# Altium PCB zynqEXP.PcbDoc (part 2 of 2)
Units mil, origin at the board's own origin, x right, y up, seen from the top; angles counter-clockwise.
Board outline 7005 x 5105 mil, 2 copper layers (Top Layer, Bottom Layer); 92 components, 234 nets, 748 pads, 222 vias.
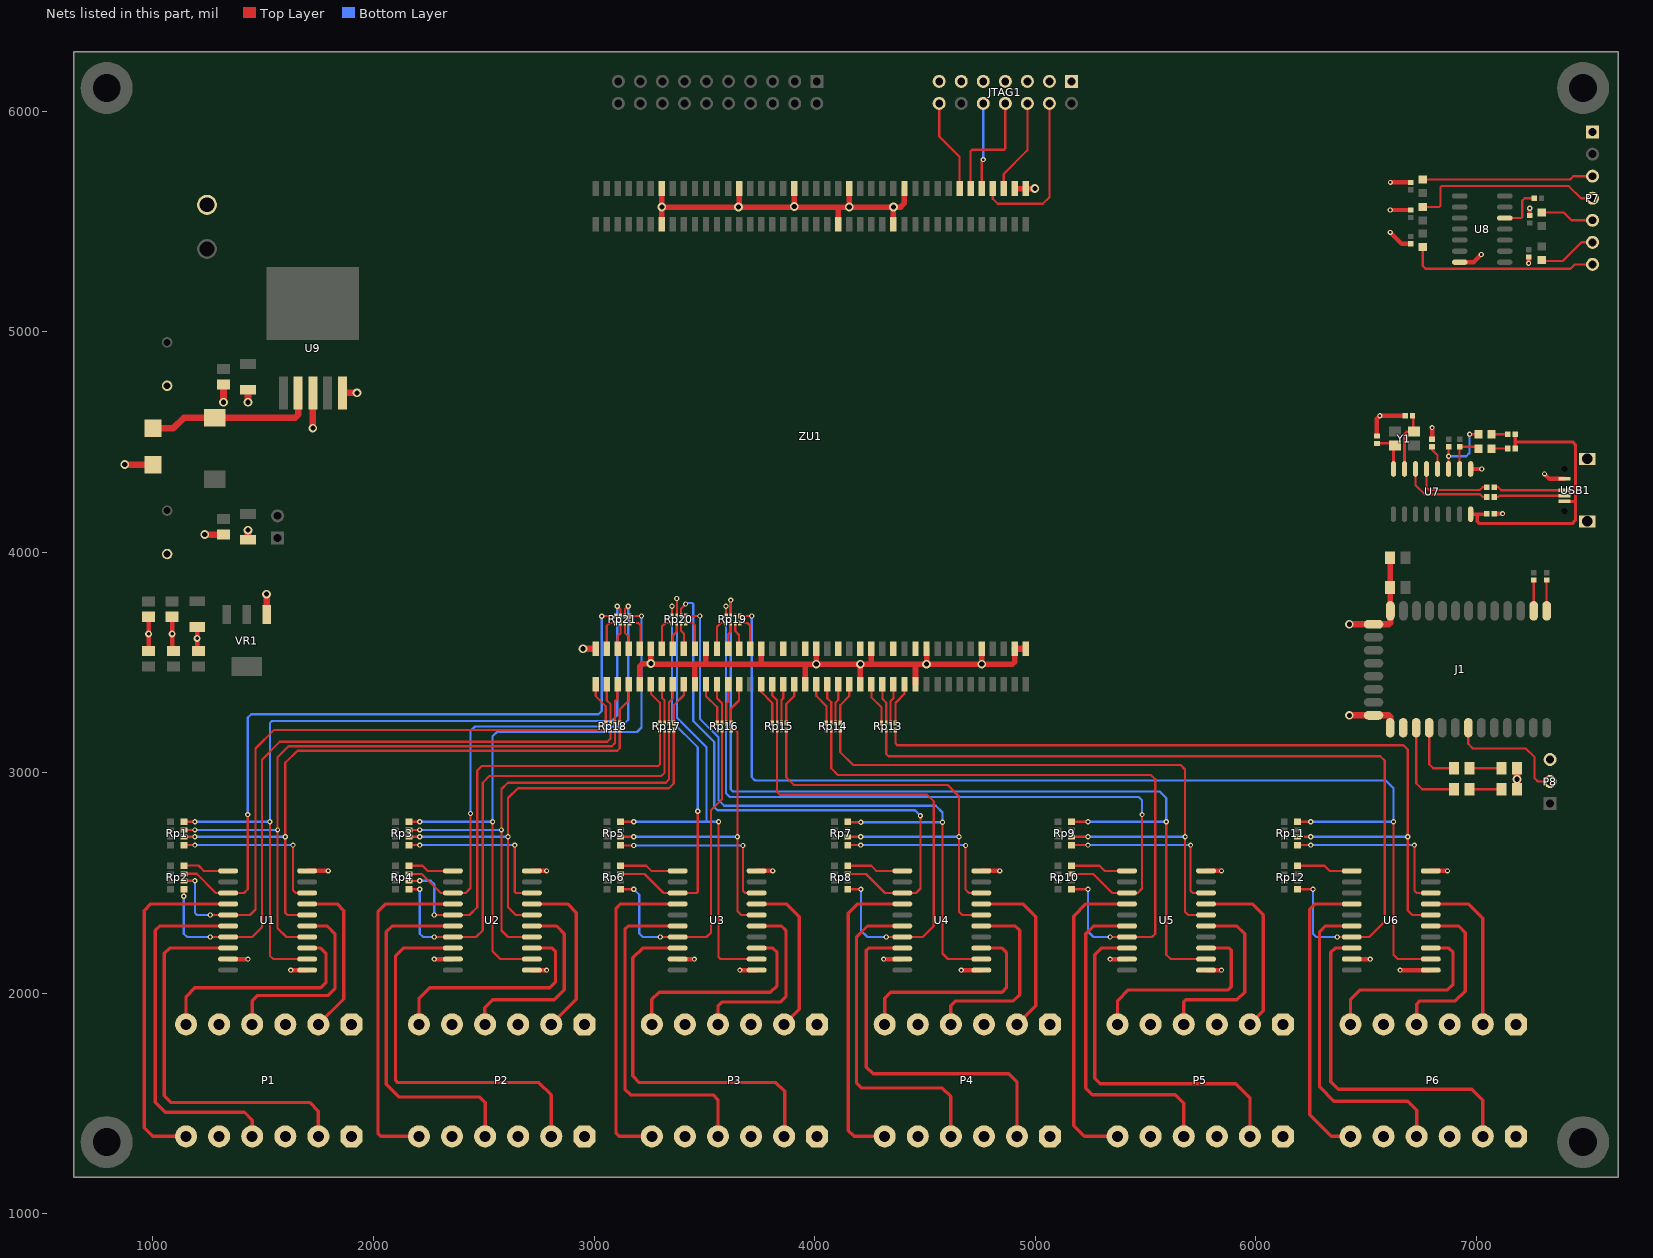
[diagram p2: the nets of this part, all layers, seen from the top]

## Via types
v1: diameter 23.62, hole 11.81, Top Layer to Bottom Layer, tented both sides, 191 vias
v2: diameter 39.37, hole 23.62, Top Layer to Bottom Layer, tented both sides, 24 vias
v3: diameter 31.5, hole 15.75, Top Layer to Bottom Layer, tented both sides, 7 vias

## Nets (pads, with @x,y where several pads share a name; then routed paths per layer and width w, separated by ;. In a path a pad name is that pad's centre, name@x,y a point inside that pad or via, vN(x,y) a via of type N, cw(c..) or ccw(c..) an arc to the next point about the centre after c; other vN are vias at no path point) (continued)
B35_LN16: Rp10.7 Rp19.4 U5.13 | length 3555.8
  Top Layer w10: Rp19.4@3598.5,3710.75 v1(3598.5,3755) ; Rp10.7@5165.32,2540.75 5264.25,2540.75 5350,2455 U5.13@5416.87,2455 5465,2455 5485,2475 v1(5485,2810)
  Bottom Layer w10: v1(3598.5,3755) 3598.5,2906.5 3615,2890 5470,2890 5485,2875 v1(5485,2810)
B35_LN17: Rp3.7 Rp17.7 U2.4 | length 2213.5
  Top Layer w10: Rp3.7@2160.32,2740.75 v1(2210,2740.75) ; U2.4@2718.13,2255 2610,2255 2580,2285 v1(2580,2740.75) 2580,2925.75 2609.25,2955 3325,2955 3339.84,2969.84 Rp17.7@3339.84,3194.25
  Bottom Layer w10: v1(2210,2740.75) v1(2580,2740.75)
B35_LN18: Rp8.7 Rp20.2 U4.13 | length 2716.1
  Top Layer w10: Rp20.2@3394.84,3710.75 3394.84,3744.84 v1(3415,3765) ; Rp8.7@4150.32,2540.75 4233.5,2540.75 4319.25,2455 U4.13@4397.87,2455 4460,2455 4480,2475 v1(4480,2805)
  Bottom Layer w10: v1(3415,3765) 3420,3770 3445,3770 3450,3765 3450,3234.12 3545,3139.12 3545,2845 3560,2830 4455,2830 v1(4480,2805)
B35_LN19: Rp4.6 Rp17.5 U2.15 | length 2086.8
  Top Layer w10: Rp4.6@2160.32,2509.25 2209.25,2509.25 v1(2210,2510) ; v1(2275,2355) U2.15@2359.87,2355 2435,2355 2470,2390 2470,3010 2490,3030 3290,3030 3298.5,3038.5 Rp17.5@3298.5,3194.25
  Bottom Layer w10: v1(2210,2510) 2260,2510 2275,2495 v1(2275,2355)
B35_LN20: Rp6.7 Rp20.4 U3.13 | length 1774.8
  Top Layer w10: Rp6.7@3120.32,2540.75 3229.25,2540.75 3315,2455 U3.13@3378.87,2455 3465,2455 3470,2460 v1(3470,2825) ; Rp20.4@3353.5,3710.75 v1(3353.5,3755)
  Bottom Layer w10: v1(3353.5,3755) 3353.5,3231.5 3470,3115 v1(3470,2825)
B35_LN21: Rp1.7 Rp18.7 U1.4 | length 2966.5
  Top Layer w10: Rp1.7@1140.32,2740.75 v1(1190,2740.75) ; U1.4@1699.13,2255 1605,2255 1565,2295 v1(1565,2740.75) 1565,3070 1615,3120 3080,3120 3094.84,3134.84 Rp18.7@3094.84,3194.25
  Bottom Layer w10: v1(1190,2740.75) v1(1565,2740.75)
B35_LN22: Rp4.7 Rp21.2 U2.13 | length 2338.6
  Top Layer w10: Rp4.7@2160.32,2540.75 2219.25,2540.75 2305,2455 U2.13@2359.87,2455 2418.15,2455 2440,2476.85 v1(2440,2815) ; Rp21.2@3139.84,3710.75 3139.84,3739.84 v1(3155,3755)
  Bottom Layer w10: v1(2440,2815) 2440,3190 2460,3210 3125,3210 3155,3240 v1(3155,3755)
B35_LN23: Rp2.6 Rp18.5 U1.15 | length 2837.6
  Top Layer w10: Rp2.6@1140.32,2510 v1(1190,2510) ; v1(1260,2355) U1.15@1340.87,2355 1440,2355 1465,2380 1465,3110 1549.25,3194.25 Rp18.5@3053.5,3194.25
  Bottom Layer w10: v1(1190,2510) 1190,2365 1200,2355 v1(1260,2355)
B35_LN24: Rp2.7 Rp21.4 U1.13 | length 3221.9
  Top Layer w10: Rp2.7@1140.32,2541.5 1198.5,2541.5 1285,2455 U1.13@1340.87,2455 1413.15,2455 1430,2471.85 v1(1430,2810) ; v1(3035,3710) 3035.75,3710.75 Rp21.4@3098.5,3710.75
  Bottom Layer w10: v1(1430,2810) 1430,3250 1445,3265 3020,3265 3035,3280 v1(3035,3710)
B35_LP1: Rp11.6 Rp13.8 U6.6 | length 3738.5
  Top Layer w10: Rp13.8@4366.5,3194.25 4366.5,3133.5 4375,3125 6670,3125 6690,3105 v1(6690,2710) 6690,2375 6710,2355 U6.6@6794.13,2355 ; Rp11.6@6190.32,2709.25 v1(6250,2709.25)
  Bottom Layer w10: v1(6250,2709.25) 6689.25,2709.25 v1(6690,2710)
B35_LP2: ZU1.102
B35_LP3: Rp12.5 Rp13.6 U6.17 | length 3743.4
  Top Layer w10: Rp13.6@4325.16,3194.25 4325.16,3084.84 4335,3075 6565,3075 6585,3055 6585,2325 6515,2255 U6.17@6435.87,2255 v1(6370,2255) ; Rp12.5@6190.32,2471.85 v1(6260,2471.85)
  Bottom Layer w10: v1(6260,2471.85) 6260,2270 6275,2255 v1(6370,2255)
B35_LP4: ZU1.106
B35_LP5: Rp9.6 Rp14.8 U5.6 | length 2957.1
  Top Layer w10: Rp14.8@4116.5,3194.25 4116.5,3093.5 4175,3035 5660,3035 5680,3015 v1(5680,2709.25) 5680,2370 5695,2355 U5.6@5775.13,2355 ; Rp9.6@5165.32,2709.25 v1@5239.25,2709.25
  Bottom Layer w10: v1(5240,2709.25) v1(5680,2709.25)
B35_LP6: ZU1.112
B35_LP7: Rp10.5 Rp14.6 U5.17 | length 2953
  Top Layer w10: Rp14.6@4075.16,3194.25 4075.16,3019.84 4105,2990 5525,2990 5545,2970 5545,2270 5530,2255 U5.17@5416.87,2255 v1(5340,2255) ; Rp10.5@5165.32,2471.85 v1(5240,2471.85)
  Bottom Layer w10: v1(5240,2471.85) 5240,2280 5265,2255 v1(5340,2255)
B35_LP8: ZU1.116
B35_LP9: Rp7.6 Rp15.8 U4.6 | length 2169.1
  Top Layer w10: Rp15.8@3871.5,3194.25 3871.5,2979.25 3905.75,2945 4602.64,2945 4655,2892.64 v1(4655,2709.25) 4655,2370 4670,2355 U4.6@4756.13,2355 ; Rp7.6@4150.32,2709.25 v1(4209.25,2709.25)
  Bottom Layer w10: v1(4209.25,2709.25) v1(4655,2709.25)
B35_LP10: ZU1.122
B35_LP11: Rp8.5 Rp15.6 U4.17 | length 2183.9
  Top Layer w10: Rp15.6@3830.16,3194.25 3830.16,2912.48 3842.64,2900 4510,2900 4540,2870 4540,2305 4490,2255 U4.17@4397.87,2255 v1(4325,2255) ; Rp8.5@4150.32,2471.85 v1(4210,2471.85)
  Bottom Layer w10: v1(4210,2471.85) 4210,2285 4240,2255 v1(4325,2255)
B35_LP12: ZU1.126
B35_LP13: Rp5.6 Rp16.8 U3.6 | length 1468.8
  Top Layer w10: Rp5.6@3120.32,2709.25 v1(3180,2709.25) ; Rp16.8@3621.5,3194.25 3640.75,3194.25 3650,3185 v1(3650,2709.25) 3650,2372.64 3667.64,2355 U3.6@3737.13,2355
  Bottom Layer w10: v1(3180,2709.25) v1(3650,2709.25)
B35_LP14: Rp11.8 Rp19.1 U6.2 | length 5082.1
  Top Layer w10: Rp19.1@3661.5,3710.75 v1(3715,3710.75) ; Rp11.8@6190.32,2778.15 v1(6250,2778.15) ; v1(6625,2778.15) 6625,2175 6645,2155 U6.2@6794.13,2155
  Bottom Layer w10: v1(3715,3710.75) 3715,2980 3730,2965 6590,2965 6625,2930 v1(6625,2778.15) v1(6250,2778.15)
B35_LP15: Rp6.5 Rp16.6 U3.17 | length 1551
  Top Layer w10: Rp6.5@3120.32,2471.85 v1(3180,2471.85) ; v1(3300,2255) U3.17@3378.87,2255 3510,2255 3530,2275 3530,2830 3580.16,2880.16 Rp16.6@3580.16,3194.25
  Bottom Layer w10: v1(3180,2471.85) 3205,2446.85 3205,2270.75 3220.75,2255 v1(3300,2255)
B35_LP16: Rp9.8 Rp19.3 U5.2 | length 4249.2
  Top Layer w10: Rp19.3@3620.16,3710.75 3620.31,3710.91 v1(3620.31,3782.69) ; Rp9.8@5165.32,2778.15 v1(5240,2778.15) ; v1(5595,2778.15) 5595,2175 5615,2155 U5.2@5775.13,2155
  Bottom Layer w10: v1(3620.31,3782.69) 3620.31,2924.69 3630,2915 5565,2915 5595,2885 v1(5595,2778.15) v1(5240,2778.15)
B35_LP17: Rp3.6 Rp17.8 U2.6 | length 2089.7
  Top Layer w10: Rp3.6@2160.32,2709.25 2209.25,2709.25 v1(2210,2710) ; U2.6@2718.13,2355 2645,2355 2610,2390 2610,2885 2655,2930 3340,2930 3361.5,2951.5 Rp17.8@3361.5,3194.25
  Bottom Layer w10: v1(2210,2710) 2609.25,2710 v1(2610,2709.25)
B35_LP18: Rp7.8 Rp20.1 U4.2 | length 3229.7
  Top Layer w10: Rp20.1@3416.5,3710.75 v1(3480,3710.75) ; Rp7.8@4150.32,2778.15 4153.46,2775 v1(4210,2775) ; v1(4580,2775) 4580,2180 4605,2155 U4.2@4756.13,2155
  Bottom Layer w10: v1(3480,3710.75) 3480,3245 3565,3160 3565,2875 3590,2850 4550,2850 4580,2820 v1(4580,2775) v1(4210,2775)
B35_LP19: Rp4.5 Rp17.6 U2.17 | length 2263.1
  Top Layer w10: Rp4.5@2160.32,2471.85 v1(2210,2471.85) ; v1(2275,2255) U2.17@2359.87,2255 2465,2255 2495,2285 2495,2955 2525,2985 3305,2985 3320.16,3000.16 Rp17.6@3320.16,3194.25
  Bottom Layer w10: v1(2210,2471.85) 2210,2270 2225,2255 v1(2275,2255)
B35_LP20: Rp5.8 Rp20.3 U3.2 | length 2383
  Top Layer w10: Rp5.8@3120.32,2778.15 v1(3180,2778.15) ; v1(3375,3790) 3376.31,3788.69 3376.31,3711.91 Rp20.3@3375.16,3710.75 ; v1(3565,2778.15) 3565,2163.5 3573.5,2155 U3.2@3737.13,2155
  Bottom Layer w10: v1(3180,2778.15) v1(3565,2778.15) ; v1(3375,3790) 3376.31,3788.69 3376.31,3248.69 3510,3115 3510,2778.15
B35_LP21: Rp1.6 Rp18.8 U1.6 | length 2870.8
  Top Layer w10: Rp1.6@1140.32,2709.25 v1(1190,2709.25) ; U1.6@1699.13,2355 1610,2355 1600,2365 v1(1600,2710) 1600,3045 1655,3100 3105,3100 3116.5,3111.5 Rp18.8@3116.5,3194.25
  Bottom Layer w10: v1@1189.25,2709.25 1599.25,2709.25 v1(1600,2710)
B35_LP22: Rp3.8 Rp21.1 U2.2 | length 2798.1
  Top Layer w10: Rp3.8@2160.32,2778.15 v1(2210,2778.15) ; v1(2540,2778.15) 2540,2190 2575,2155 U2.2@2718.13,2155 ; Rp21.1@3161.5,3710.75 v1(3215,3710.75)
  Bottom Layer w10: v1(2210,2778.15) v1(2540,2778.15) 2540,3165 2560,3185 3195,3185 3215,3205 v1(3215,3710.75)
B35_LP23: Rp2.5 Rp18.6 U1.17 | length 3001.2
  Top Layer w10: v1(1140,2440) 1140.32,2440.32 Rp2.5@1140.32,2472.6 ; v1(1260,2255) U1.17@1340.87,2255 1450,2255 1495,2300 1495,3060 1575,3140 3060,3140 3075.16,3155.16 Rp18.6@3075.16,3194.25
  Bottom Layer w10: v1(1140,2440) 1140,2270 1155,2255 v1(1260,2255)
B35_LP24: Rp1.8 Rp21.3 U1.2 | length 3756.9
  Top Layer w10: Rp1.8@1140.32,2778.15 v1(1190,2778.15) ; v1@1530,2780 v1(1530,2778.15) 1530,2170 1545,2155 U1.2@1699.13,2155 ; v1(3105,3755) 3120.16,3739.84 Rp21.3@3120.16,3710.75
  Bottom Layer w10: v1(1190,2778.15) v1(1530,2778.15) 1530,3225 1540,3235 3080,3235 3105,3260 v1(3105,3755)
BLE_SLEEP: J1.23
CH340_RXD: D3.K R12.2 U7.3 | length 326.8
  Top Layer w10: U7.3@6875,4377.36 R12.2@6875,4478.27 ; v1(6970,4535) D3.K@7009.69,4535
  Bottom Layer w10: v1(6875,4435) 6955,4435 6970,4450 v1(6970,4535)
CH340_TXD: D4.K R11.2 U7.2 | length 189
  Top Layer w10: U7.2@6925,4377.36 R11.2@6925,4478.27 7001.42,4478.27 D4.K@7009.69,4470
D0: P7.3 R1.2 | length 776.1
  Top Layer w10: R1.2@6757.64,5690.32 7425.32,5690.32 7440,5705 P7.3@7527.64,5705
D1: P7.4 R3.2 | length 881.8
  Top Layer w10: R3.2@6757.64,5565.32 6832.95,5565.32 6837.64,5570 6837.64,5655 6842.64,5660 7420,5660 7475,5605 P7.4@7527.64,5605
D2: P7.5 R9.2 | length 244.6
  Top Layer w10: R9.2@7297.64,5540.32 7397.32,5540.32 7432.64,5505 P7.5@7527.64,5505
D3: P7.6 R7.2 | length 267.1
  Top Layer w10: R7.2@7297.64,5324.69 7302.32,5320 7392.64,5320 7477.64,5405 P7.6@7527.64,5405
DIR0: P1.4 U1.16 | length 1666.2
  Top Layer w15: U1.16@1340.87,2305 1030,2305 1010,2285 1010,1505 1055,1460 1415,1460 1450,1425 P1.4@1450,1351.06
DIR1: P2.4 U2.16 | length 1639.2
  Top Layer w15: U2.16@2359.87,2305 2085,2305 2058.15,2278.15 2058.15,1586.85 2115,1530 2480,1530 2506,1504 P2.4@2506,1351.06
DIR2: P3.4 U3.16 | length 1578.5
  Top Layer w15: U3.16@3378.87,2305 3155,2305 3140,2290 3140,1565 3166,1539 3541,1539 3562,1518 P3.4@3562,1351.06
DIR3: P4.4 U4.16 | length 1523.6
  Top Layer w15: U4.16@4397.87,2305 4240,2305 4190,2255 4190,1595 4215,1570 4580,1570 4618,1532 P4.4@4618,1351.06
DIR4: P5.4 U5.16 | length 1523.9
  Top Layer w15: U5.16@5416.87,2305 5265,2305 5230,2270 5230,1570 5260,1540 5635,1540 5674,1501 P5.4@5674,1351.06
DIR5: P6.4 U6.16 | length 1463.7
  Top Layer w15: U6.16@6435.87,2305 6315,2305 6290,2280 6290,1575 6355,1510 6690,1510 6730,1470 P6.4@6730,1351.06
DIR6: P1.10 U1.5 | length 894.2
  Top Layer w15: P1.10@1450,1858.94 1450,1965 1475,1990 1795,1990 1825,2020 1825,2270 1790,2305 U1.5@1699.13,2305
DIR7: P2.10 U2.5 | length 886
  Top Layer w15: P2.10@2506,1858.94 2505,1859.94 2505,1935 2540,1970 2820,1970 2865,2015 2865,2270 2830,2305 U2.5@2718.13,2305
DIR8: P3.10 U3.5 | length 850
  Top Layer w15: P3.10@3562,1858.94 3562,1942 3580,1960 3845,1960 3870,1985 3870,2285 3850,2305 U3.5@3737.13,2305
DIR9: P4.10 U4.5 | length 890.9
  Top Layer w15: P4.10@4618,1858.94 4618,1943 4640,1965 4902,1965 4930,1993 4930,2285 4910,2305 U4.5@4756.13,2305
DIR10: P5.10 U5.5 | length 850.7
  Top Layer w15: P5.10@5674,1858.94 5674,1961 5683,1970 5915,1970 5950,2005 5950,2270 5915,2305 U5.5@5775.13,2305
DIR11: P6.10 U6.5 | length 769.2
  Top Layer w15: P6.10@6730,1858.94 6730,1950 6745,1965 6905,1965 6950,2010 6950,2275 6920,2305 U6.5@6794.13,2305
ENA0: P1.2 U1.18 | length 1788.5
  Top Layer w15: U1.18@1340.87,2205 1075,2205 1050.75,2180.75 1050.75,1534.25 1080,1505 1710,1505 1750,1465 P1.2@1750,1351.06
ENA1: P2.2 U2.18 | length 1760.6
  Top Layer w15: U2.18@2359.87,2205 2135,2205 2100,2170 2100,1605 2110,1595 2750,1595 2806,1539 P2.2@2806,1351.06
ENA2: P3.2 U3.18 | length 1681.7
  Top Layer w15: U3.18@3378.87,2205 3220,2205 3175,2160 3175,1625 3205,1595 3825,1595 3865,1555 3865,1354.06 P3.2@3862,1351.06
ENA3: P4.2 U4.18 | length 1654.1
  Top Layer w15: U4.18@4397.87,2205 4245,2205 4235,2195 4235,1665 4265,1635 4880,1635 4918,1597 P4.2@4918,1351.06
ENA4: P5.2 U5.18 | length 1635.1
  Top Layer w15: U5.18@5416.87,2205 5300,2205 5270,2175 5270,1615 5295,1590 5910,1590 5974,1526 P5.2@5974,1351.06
ENA5: P6.2 U6.18 | length 1578.9
  Top Layer w15: U6.18@6435.87,2205 6360,2205 6340,2185 6340,1598.94 6373.94,1565 6980,1565 7030,1515 P6.2@7030,1351.06
ENA6: P1.8 U1.7 | length 742
  Top Layer w15: U1.7@1699.13,2405 1835,2405 1865,2375 1865,1973.94 P1.8@1750,1858.94
ENA7: P2.8 U2.7 | length 771.7
  Top Layer w15: U2.7@2718.13,2405 2880,2405 2920,2365 2920,1972.94 P2.8@2806,1858.94
ENA8: P3.8 U3.7 | length 733.5
  Top Layer w15: U3.7@3737.13,2405 3872.64,2405 3930,2347.64 3930,1926.94 P3.8@3862,1858.94
ENA9: P4.8 U4.7 | length 793.9
  Top Layer w15: U4.7@4756.13,2405 4945,2405 5002.64,2347.36 5002.64,1943.57 P4.8@4918,1858.94
ENA10: P5.8 U5.7 | length 801.9
  Top Layer w15: U5.7@5775.13,2405 5985,2405 6035,2355 6035,1919.94 P5.8@5974,1858.94
ENA11: P6.8 U6.7 | length 743.9
  Top Layer w15: U6.7@6794.13,2405 6965,2405 7030,2340 P6.8@7030,1858.94
GND: C1.1 C2.1 C3.1 C4.1 C5.1 C6.1 C7.1 C8.1 C9.1 C10.1 C11.1 C12.1 C13.2 C14.2 C15.1 C16.1 C17.1 C18.2 D1.K D2.K D5.1 J1.13 J1.14 J1.21 J1.22 JTAG1.1 JTAG1.2 JTAG1.3 JTAG1.4 JTAG1.5 JTAG1.6 JTAG1.7 P1.1 P1.3 P1.5 P1.7 P1.9 P1.11 P2.1 P2.3 P2.5 P2.7 P2.9 P2.11 P3.1 P3.3 P3.5 P3.7 P3.9 P3.11 P4.1 P4.3 P4.5 P4.7 P4.9 P4.11 P5.1 P5.3 P5.5 P5.7 P5.9 P5.11 P6.1 P6.3 P6.5 P6.7 P6.9 P6.11 P7.1 P8.3 P10.1 R2.1 R4.1 R6.1 R8.1 R10.1 U1.1 U1.10 U1.19 U2.1 U2.10 U2.19 U3.1 U3.10 U3.19 U4.1 U4.10 U4.19 U5.1 U5.10 U5.19 U6.1 U6.10 U6.19 U7.1 U8.7 U9.3 U9.5 USB1.5 USB1.6 USB1.7 VR1.1 ZU1.2 ZU1.4 ZU1.24 ZU1.25 ZU1.34 ZU1.35 ZU1.44 ZU1.54 ZU1.67 ZU1.68 ZU1.82 ZU1.84 ZU1.90 ZU1.100 ZU1.101 ZU1.110 ZU1.111 ZU1.120 ZU1.121 ZU1.130 ZU1.140 ZU1.141 ZU1.150 ZU1.151 ZU1.160 | length 9001.2
  Top Layer w20: C12.1@980,3551.2 C9.1@980,3707.19 ; C7.1@1086.75,3707.19 1086.75,3557.7 C11.1@1093.25,3551.2 ; C8.1@1200,3660.54 1200,3557.7 C10.1@1206.5,3551.2 ; U1.19@1340.87,2155 v1(1430.8,2155) ; v1(1625,2105) U1.1@1699.13,2105 ; U1.10@1699.13,2555 v1(1795,2555) ; v1(2275,2155) U2.19@2359.87,2155 ; U2.1@2718.13,2105 v1(2785,2105) ; U2.10@2718.13,2555 v1(2785,2555) ; U3.19@3378.87,2155 v1(3455,2155) ; v1(3661.5,2105) U3.1@3737.13,2105 ; U3.10@3737.13,2555 v1(3810,2555) ; v1(4312.88,2155) U4.19@4397.87,2155 ; v1(4665,2105) U4.1@4756.13,2105 ; U4.10@4756.13,2555 v1(4840,2555) ; v1(5340,2155) U5.19@5416.87,2155 ; U5.1@5775.13,2105 v1(5845,2105) ; U5.10@5775.13,2555 v1(5845,2555) ; U6.19@6435.87,2155 v1(6520,2155) ; C5.1@6550,4526.73 6550,4605 v1(6563.27,4618.27) C3.1@6678.27,4618.27 ; v1(6609.91,5450) 6661.65,5398.27 R6.1@6702.64,5398.27 ; v1(6609.91,5551.73) R4.1@6702.64,5551.73 ; C4.1@6609.96,3975 C4.1@6611.25,3973.71 ; v1(6611.25,5676.73) R2.1@6702.64,5676.73 ; v1(6655,2105) U6.1@6794.13,2105 ; U6.10@6794.13,2555 v1(6870,2555) ; C1.1@6800,4511.73 v1(6800,4565) ; U8.7@6925.28,5315 6988.3,5315 v1(7023.3,5350) ; U7.1@6975,4377.36 v1(7025,4377.36) ; C6.1@7081.73,4175 v1(7120,4175) ; v1(7237.64,5310) R8.1@7237.64,5338.27 ; R10.1@7242.64,5526.73 v1(7242.64,5560) ; v1(7310,4355) 7332.64,4332.36 USB1.5@7400,4332.36
  Top Layer w25: ZU1.151@3207.64,3400.83 3207.64,3482.64 3218.68,3493.68 v2@3258.96,3493.68 ; v2(3257.64,3495) ZU1.150@3257.64,3562.24 ; v2@3260.28,3492.36 3457.36,3492.36 ; ZU1.67@3307.64,5487.44 v2(3307.64,5565) ; ZU1.68@3307.64,5648.86 v2(3307.64,5565) ; ZU1.141@3457.64,3400.83 3457.64,3492.64 ; 3457.64,3492.36 3507.64,3492.36 ; ZU1.140@3507.64,3562.24 3507.64,3492.36 ; ZU1.54@3657.64,5648.86 3657.64,5567.64 v2(3655,5565) ; ZU1.130@3757.64,3562.24 3757.64,3495 3755,3492.36 ; v2(3907.64,5567.64) ZU1.44@3907.64,5648.86 ; ZU1.121@3957.64,3400.83 3957.64,3492.36 ; ZU1.120@4007.64,3562.24 v2(4007.64,3492.36) ; ZU1.35@4107.64,5487.44 4107.64,5565 ; v2(4157.64,5565) ZU1.34@4157.64,5648.86 ; ZU1.111@4207.64,3400.83 v2(4207.64,3492.36) ; ZU1.110@4257.64,3562.24 4257.64,3492.36 ; v2@4355,5565 v2(3655,5565) ; ZU1.25@4357.64,5487.44 v2(4357.64,5565) 4390,5565 4407.64,5582.64 ZU1.24@4407.64,5648.86 ; ZU1.101@4457.64,3400.83 4457.64,3492.36 ; v2(4507.64,3492.36) ZU1.100@4507.64,3562.24 ; ZU1.90@4757.64,3562.24 v2(4757.64,3492.36) ; ZU1.84@4907.64,3562.24 4907.64,3502.64 4897.36,3492.36 v2(4757.64,3492.36) ; ZU1.4@4907.64,5648.86 ZU1.2@4957.64,5648.86 v2(4998.86,5648.86) ; J1.13@6611.25,3734 6611.25,3973.71 C4.1@6611.25,3975 ; v2(3307.64,5565) v2(3655,5565) ; 3507.64,3492.36 3755,3492.36 ; 3755,3492.36 3957.64,3492.36 ; 3957.64,3492.36 v2(4007.64,3492.36) ; v2(4007.64,3492.36) v2(4207.64,3492.36) ; v2(4207.64,3492.36) 4257.64,3492.36 ; 4257.64,3492.36 v2(4757.64,3492.36)
  Top Layer w30: v2(872.32,4397.32) D5.1@1000,4397.32 ; v2(1235,4080) v2(1235,4080) C16.1@1320,4079.96 ; v2(1320,4680) C13.2@1320,4759.96 ; C17.1@1430.8,4056.34 v2(1430.8,4100) ; v2(1430.8,4680) C14.2@1430.8,4736.34 ; VR1.1@1515.55,3717.31 v2@1515.55,3809.45 ; v2(1725,4562.68) U9.3@1725,4722.44 ; U9.5@1858.86,4722.44 v2(1925,4722.44) ; v2(2950,3562.24) ZU1.160@3007.64,3562.24 ; v2(3257.64,3495) v2@3260.28,3492.36 ; ZU1.84@4907.64,3562.24 ZU1.82@4957.64,3562.24 ; v2(6425,3260) 6534.35,3260 J1.21@6534.48,3259.87 6603.17,3259.87 6609.91,3253.12 J1.22@6609.91,3204 ; v2(6425,3673.25) J1.14@6534.48,3673.25 6603.17,3673.25 6611.25,3681.34 J1.13@6611.25,3734 ; D2.K@7185.04,2925 D1.K@7185.04,3020
  other v2: 7185,2970 1515,3810
  other v3: 1200,3609.12 980,3629.2 1086.75,3630
NetC3_2: C3.2 U7.7 Y1.1 | length 278.8
  Top Layer w12: U7.7@6675,4377.36 6675,4535 6686.5,4546.5 Y1.1@6718.31,4546.5 6715,4549.8 C3.2@6715,4618.27
NetC5_2: C5.2 U7.8 Y1.3 | length 194.7
  Top Layer w12: C5.2@6550,4493.27 6621.93,4493.27 Y1.3@6631.69,4483.5 6625,4476.81 U7.8@6625,4377.36
NetD1_A: D1.A R15.2 | length 144.9
  Top Layer w10: R15.2@6970.04,3020 D1.A@7114.96,3020
NetD2_A: D2.A R16.2 | length 144.9
  Top Layer w10: R16.2@6970.04,2925 D2.A@7114.96,2925
NetD3_A: D3.A R17.1 | length 73
  Top Layer w10: D3.A@7070.32,4535 R17.1@7143.27,4535
NetD4_A: D4.A R18.2 | length 73
  Top Layer w10: D4.A@7070.32,4470 R18.2@7143.27,4470
NetD5_2: D5.2 L1.2 U9.2 | length 782.5
  Top Layer w30: D5.2@1000,4562.68 1092.68,4562.68 1140,4610 L1.2@1280,4610 1645,4610 1658.07,4623.07 U9.2@1658.07,4722.44
NetJ1_1: J1.1 R20.2 | length 139.4
  Top Layer w10: R20.2@7319.48,3873.27 7319.48,3734.43 J1.1@7319.91,3734
NetJ1_2: J1.2 R21.2 | length 139.3
  Top Layer w10: J1.2@7260.86,3734 R21.2@7260.86,3873.27
NetJ1_24: J1.24 R16.1 | length 435.1
  Top Layer w10: J1.24@6728.02,3204 6728.02,2951.98 6755,2925 R16.1@6899.96,2925
NetJ1_25: J1.25 R15.1 | length 286.4
  Top Layer w10: J1.25@6787.08,3204 6787.08,3037.92 6805,3020 R15.1@6899.96,3020
NetJ1_28: J1.28 P8.2 | length 565.4
  Top Layer w10: J1.28@6964.24,3204 6964.24,3130.76 6985,3110 7225,3110 7265,3070 7265,2975 7280,2960 P8.2@7330,2960
NetR19_1: R19.1 U8.12 | length 214.1
  Top Layer w10: U8.12@7130,5515 7204.37,5515 7209.37,5520 7209.37,5594.37 7220,5605 R19.1@7263.27,5605
NetRp1_5: Rp1.5 U1.8 | length 768.7
  Top Layer w10: Rp1.5@1140.32,2671.85 v1(1190,2671.85) ; v1(1635,2671.85) 1635,2466.85 1646.85,2455 U1.8@1699.13,2455
  Bottom Layer w10: v1(1190,2671.85) v1(1635,2671.85)
NetRp2_8: Rp2.8 U1.11 | length 210.4
  Top Layer w10: Rp2.8@1140.32,2578.9 1206.1,2578.9 1230,2555 U1.11@1340.87,2555
NetRp3_5: Rp3.5 U2.8 | length 771.7
  Top Layer w10: Rp3.5@2160.32,2671.85 v1(2210,2671.85) ; v1(2640,2671.85) 2640,2460 2645,2455 U2.8@2718.13,2455
  Bottom Layer w10: v1(2210,2671.85) v1(2640,2671.85)
NetRp4_8: Rp4.8 U2.11 | length 209.1
  Top Layer w10: Rp4.8@2160.32,2578.15 2221.85,2578.15 2245,2555 U2.11@2359.87,2555
NetRp5_5: Rp5.5 U3.8 | length 826.7
  Top Layer w10: Rp5.5@3120.32,2671.85 3122.17,2670 v1(3180,2670) ; v1(3675,2670) 3675,2465 3685,2455 U3.8@3737.13,2455
  Bottom Layer w10: v1(3180,2670) v1(3675,2670)
NetRp6_8: Rp6.8 U3.11 | length 268.1
  Top Layer w10: Rp6.8@3120.32,2578.15 3236.85,2578.15 3260,2555 U3.11@3378.87,2555
NetRp7_5: Rp7.5 U4.8 | length 812.8
  Top Layer w10: Rp7.5@4150.32,2671.85 v1(4209.25,2671.85) ; v1(4685,2670) 4685,2470 4700,2455 U4.8@4756.13,2455
  Bottom Layer w10: v1(4209.25,2671.85) 4683.15,2671.85 v1(4685,2670)
NetRp8_8: Rp8.8 U4.11 | length 257.1
  Top Layer w10: Rp8.8@4150.32,2578.15 4256.85,2578.15 4280,2555 U4.11@4397.87,2555
NetRp9_5: Rp9.5 U5.8 | length 820.8
  Top Layer w10: Rp9.5@5165.32,2671.85 v1(5240,2671.85) ; v1(5705,2671.85) 5705,2465 5715,2455 U5.8@5775.13,2455
  Bottom Layer w10: v1(5240,2671.85) v1(5705,2671.85)
NetRp10_8: Rp10.8 U5.11 | length 261.1
  Top Layer w10: Rp10.8@5165.32,2578.15 5291.85,2578.15 5315,2555 U5.11@5416.87,2555
NetRp11_5: Rp11.5 U6.8 | length 814.8
  Top Layer w10: Rp11.5@6190.32,2671.85 v1(6250,2671.85) ; v1(6720,2671.85) 6720,2465 6730,2455 U6.8@6794.13,2455
  Bottom Layer w10: v1(6250,2671.85) v1(6720,2671.85)
NetRp12_8: Rp12.8 U6.11 | length 255.1
  Top Layer w10: Rp12.8@6190.32,2578.15 6311.85,2578.15 6335,2555 U6.11@6435.87,2555
NetRp13_1: Rp13.1 ZU1.103 | length 192.1
  Top Layer w10: Rp13.1@4366.5,3225.75 4366.5,3316.34 4407.64,3357.48 ZU1.103@4407.64,3400.83
NetRp13_2: Rp13.2 ZU1.105 | length 180.4
  Top Layer w10: Rp13.2@4344.84,3225.75 4344.84,3324.84 4357.64,3337.64 ZU1.105@4357.64,3400.83
NetRp13_3: Rp13.3 ZU1.107 | length 182.3
  Top Layer w10: ZU1.107@4307.64,3400.83 4307.64,3334.84 4325.16,3317.32 Rp13.3@4325.16,3225.75
NetRp13_4: Rp13.4 ZU1.109 | length 194.1
  Top Layer w10: ZU1.109@4257.64,3400.83 4257.64,3342.36 4303.5,3296.5 Rp13.4@4303.5,3225.75
NetRp14_1: Rp14.1 ZU1.113 | length 192.1
  Top Layer w10: Rp14.1@4116.5,3225.75 4116.5,3306.5 4157.64,3347.64 ZU1.113@4157.64,3400.83
NetRp14_2: Rp14.2 ZU1.115 | length 180.4
  Top Layer w10: Rp14.2@4094.84,3225.75 4094.84,3317.48 4107.64,3330.28 ZU1.115@4107.64,3400.83
NetRp14_3: Rp14.3 ZU1.117 | length 182.3
  Top Layer w10: ZU1.117@4057.64,3400.83 4057.64,3337.36 4075.16,3319.84 Rp14.3@4075.16,3225.75
NetRp14_4: Rp14.4 ZU1.119 | length 194.1
  Top Layer w10: ZU1.119@4007.64,3400.83 4007.64,3348.86 4053.5,3302.99 Rp14.4@4053.5,3225.75
NetRp15_1: Rp15.1 ZU1.123 | length 190
  Top Layer w10: Rp15.1@3871.5,3225.75 3871.5,3311.5 3907.64,3347.64 ZU1.123@3907.64,3400.83
NetRp15_2: Rp15.2 ZU1.125 | length 178.3
  Top Layer w10: Rp15.2@3849.84,3225.75 3849.84,3330 3857.64,3337.8 ZU1.125@3857.64,3400.83
NetRp15_3: Rp15.3 ZU1.127 | length 184.4
  Top Layer w10: ZU1.127@3807.64,3400.83 3807.64,3349.84 3830.16,3327.32 Rp15.3@3830.16,3225.75
NetRp15_4: Rp15.4 ZU1.129 | length 196.1
  Top Layer w10: ZU1.129@3757.64,3400.83 3757.64,3367.36 3808.5,3316.5 Rp15.4@3808.5,3225.75
NetRp16_1: Rp16.1 ZU1.133 | length 190
  Top Layer w10: Rp16.1@3621.5,3225.75 3621.5,3291.5 3657.64,3327.64 ZU1.133@3657.64,3400.83
NetRp16_2: Rp16.2 ZU1.135 | length 178.3
  Top Layer w10: Rp16.2@3599.84,3225.75 3600,3225.91 3600,3315 3607.64,3322.64 ZU1.135@3607.64,3400.83
NetRp16_3: Rp16.3 ZU1.137 | length 184.4
  Top Layer w10: ZU1.137@3557.64,3400.83 3557.64,3337.52 3580.16,3315 Rp16.3@3580.16,3225.75
NetRp16_4: Rp16.4 ZU1.139 | length 196.1
  Top Layer w10: ZU1.139@3507.64,3400.83 3507.64,3347.36 3558.5,3296.5 Rp16.4@3558.5,3225.75
NetRp17_1: Rp17.1 ZU1.143 | length 194.2
  Top Layer w10: Rp17.1@3361.5,3225.75 3361.5,3306.5 3407.64,3352.64 ZU1.143@3407.64,3400.83
NetRp17_2: Rp17.2 ZU1.145 | length 182.4
  Top Layer w10: Rp17.2@3339.84,3225.75 3339.84,3319.84 3357.64,3337.64 ZU1.145@3357.64,3400.83
NetRp17_3: Rp17.3 ZU1.147 | length 180.3
  Top Layer w10: ZU1.147@3307.64,3400.83 3307.64,3340 3320.16,3327.48 Rp17.3@3320.16,3225.75
NetRp17_4: Rp17.4 ZU1.149 | length 192
  Top Layer w10: ZU1.149@3257.64,3400.83 3257.64,3358.23 3298.5,3317.36 Rp17.4@3298.5,3225.75
NetRp18_1: Rp18.1 ZU1.153 | length 192.1
  Top Layer w10: Rp18.1@3116.5,3225.75 3116.5,3286.5 3157.64,3327.64 ZU1.153@3157.64,3400.83
NetRp18_2: Rp18.2 ZU1.155 | length 180.4
  Top Layer w10: Rp18.2@3094.84,3225.75 3094.84,3324.84 3104.84,3334.84 3104.84,3398.03 ZU1.155@3107.64,3400.83
NetRp18_3: Rp18.3 ZU1.157 | length 182.3
  Top Layer w10: ZU1.157@3057.64,3400.83 3057.64,3327.36 3075.16,3309.84 Rp18.3@3075.16,3225.75
NetRp18_4: Rp18.4 ZU1.159 | length 194.1
  Top Layer w10: ZU1.159@3007.64,3400.83 3007.64,3347.36 3053.5,3301.5 Rp18.4@3053.5,3225.75
NetRp19_5: Rp19.5 ZU1.138 | length 148.1
  Top Layer w10: ZU1.138@3557.64,3562.24 3557.64,3662.53 3574.36,3679.25 Rp19.5@3598.5,3679.25
NetRp19_6: Rp19.6 ZU1.136 | length 122.2
  Top Layer w10: ZU1.136@3607.64,3562.24 3607.64,3627.52 3620.16,3640.04 Rp19.6@3620.16,3679.25
NetRp19_7: Rp19.7 ZU1.134 | length 124.4
  Top Layer w10: Rp19.7@3639.84,3679.25 3639.84,3642.68 3657.64,3624.88 ZU1.134@3657.64,3562.24
NetRp19_8: Rp19.8 ZU1.132 | length 156.2
  Top Layer w10: Rp19.8@3661.5,3679.25 3695.75,3679.25 3707.64,3667.36 ZU1.132@3707.64,3562.24
NetRp20_5: Rp20.5 ZU1.148 | length 153.1
  Top Layer w10: ZU1.148@3307.64,3562.24 3307.64,3662.64 3324.25,3679.25 Rp20.5@3353.5,3679.25
NetRp20_6: Rp20.6 ZU1.146 | length 124.3
  Top Layer w10: ZU1.146@3357.64,3562.24 3357.64,3622.64 3375.16,3640.16 Rp20.6@3375.16,3679.25
NetRp20_7: Rp20.7 ZU1.144 | length 122.3
  Top Layer w10: Rp20.7@3394.84,3679.25 3394.84,3642.68 3407.64,3629.88 ZU1.144@3407.64,3562.24
NetRp20_8: Rp20.8 ZU1.142 | length 151.2
  Top Layer w10: Rp20.8@3416.5,3679.25 3445.75,3679.25 3457.64,3667.36 ZU1.142@3457.64,3562.24
NetRp21_5: Rp21.5 ZU1.158 | length 150.6
  Top Layer w10: ZU1.158@3057.64,3562.24 3057.64,3666.89 3070,3679.25 Rp21.5@3098.5,3679.25
NetRp21_6: Rp21.6 ZU1.156 | length 122.2
  Top Layer w10: ZU1.156@3107.64,3562.24 3107.64,3620 3120.16,3632.52 Rp21.6@3120.16,3679.25
NetRp21_7: Rp21.7 ZU1.154 | length 124.4
  Top Layer w10: Rp21.7@3139.84,3679.25 3139.84,3635.16 3157.64,3617.36 ZU1.154@3157.64,3562.24
NetRp21_8: Rp21.8 ZU1.152 | length 161.1
  Top Layer w10: Rp21.8@3161.5,3679.25 3200.75,3679.25 3210,3670 3210,3564.61 ZU1.152@3207.64,3562.24
NTRST: JTAG1.14 ZU1.14 | length 424.5
  Top Layer w10: JTAG1.14@4565,6035 4565,5885 4657.64,5792.36 ZU1.14@4657.64,5648.86
PUL0: P1.6 U1.14 | length 1584.4
  Top Layer w15: P1.6@1150,1351.06 998.94,1351.06 960,1390 960,2375 990,2405 U1.14@1340.87,2405
PUL1: P2.6 U2.14 | length 1551.1
  Top Layer w15: P2.6@2206,1351.06 2033.94,1351.06 2020,1365 2020,2370 2055,2405 U2.14@2359.87,2405
PUL2: P3.6 U3.14 | length 1474.9
  Top Layer w15: P3.6@3262,1351.06 3113.94,1351.06 3100,1365 3100,2385 3120,2405 U3.14@3378.87,2405
PUL3: P4.6 U4.14 | length 1424.3
  Top Layer w15: P4.6@4318,1351.06 4178.94,1351.06 4152.64,1377.36 4152.64,2362.64 4195,2405 U4.14@4397.87,2405
PUL4: P5.6 U5.14 | length 1433.9
  Top Layer w15: P5.6@5374,1351.06 5223.94,1351.06 5175,1400 5175,2350 5230,2405 U5.14@5416.87,2405
PUL5: P6.6 U6.14 | length 1357.2
  Top Layer w15: P6.6@6430,1351.06 6343.94,1351.06 6245,1450 6245,2380 6270,2405 U6.14@6435.87,2405
PUL6: P1.12 U1.3 | length 1014.2
  Top Layer w15: P1.12@1150,1858.94 1150,1985 1190,2025 1760,2025 1785,2050 1785,2180 1760,2205 U1.3@1699.13,2205
PUL7: P2.12 U2.3 | length 1019.8
  Top Layer w15: P2.12@2206,1858.94 2206,1976 2255,2025 2800,2025 2825,2050 2825,2190 2810,2205 U2.3@2718.13,2205
PUL8: P3.12 U3.3 | length 958.3
  Top Layer w15: P3.12@3262,1858.94 3262,1972 3295,2005 3800,2005 3830,2035 3830,2185 3810,2205 U3.3@3737.13,2205
PUL9: P4.12 U4.3 | length 972.7
  Top Layer w15: P4.12@4318,1858.94 4318,1978 4345,2005 4850,2005 4870,2025 4870,2185 4850,2205 U4.3@4756.13,2205
PUL10: P5.12 U5.3 | length 934.2
  Top Layer w15: P5.12@5374,1858.94 5374,1967 5422,2015 5875,2015 5890,2030 5890,2195 5880,2205 U5.3@5775.13,2205
PUL11: P6.12 U6.3 | length 859.2
  Top Layer w15: P6.12@6430,1858.94 6430,1970 6475,2015 6870,2015 6895,2040 6895,2185 6875,2205 U6.3@6794.13,2205
TCK: JTAG1.10 ZU1.6 | length 430.6
  Top Layer w10: ZU1.6@4857.64,5648.86 4857.64,5715 4965,5822.36 JTAG1.10@4965,6035
TDI: JTAG1.12 ZU1.10 | length 389.2
  Top Layer w10: ZU1.10@4757.64,5648.86 4757.64,5772.64 v1(4765,5780)
  Bottom Layer w10: v1(4765,5780) JTAG1.12@4765,6035
TDO: JTAG1.11 ZU1.12 | length 536.3
  Top Layer w10: ZU1.12@4707.64,5648.86 4707.64,5817.64 4715,5825 4860,5825 4865,5830 JTAG1.11@4865,6035
TMS: JTAG1.9 ZU1.8 | length 750.5
  Top Layer w10: ZU1.8@4807.64,5648.86 4807.64,5602.36 4830,5580 5035,5580 5065,5610 JTAG1.9@5065,6035
USB0_N: R13.1 USB1.2 | length 320.6
  Top Layer w10: R13.1@7081.73,4250 7100,4250 7105.59,4255.59 USB1.2@7400,4255.59
USB0_P: R14.1 USB1.3 | length 324
  Top Layer w10: R14.1@7081.73,4295 7100,4295 7113.82,4281.18 USB1.3@7400,4281.18
USB_N: R13.2 U7.6 | length 401.5
  Top Layer w10: U7.6@6725,4360 6725,4304.22 6766.72,4262.5 7017.5,4262.5 7030,4250 R13.2@7048.27,4250
USB_P: R14.2 U7.5 | length 350
  Top Layer w10: U7.5@6775,4360 6775,4292.64 6785.14,4282.5 7017.5,4282.5 7030,4295 R14.2@7048.27,4295
V3: C1.2 U7.4 | length 111.3
  Top Layer w10: C1.2@6800,4478.27 6800,4465 6825,4440 U7.4@6825,4377.36
VBUS: C6.2 R17.2 R18.1 U7.16 USB1.1 | length 1298.6
  Top Layer w15: U7.16@6975,4172.64 7005,4172.64 ; C6.2@7048.27,4175 7045.91,4172.64 7005,4172.64 ; R18.1@7176.73,4470 R17.2@7176.73,4535 ; 7176.73,4500 7438.27,4500 7450,4488.27 7450,4220 7450,4145 7435,4130 7015,4130 7005,4140 7005,4172.64 ; USB1.1@7400,4230 7450,4230
VT: P7.7 R5.2 | length 870.7
  Top Layer w10: R5.2@6757.64,5384.69 6757.64,5297.36 6770,5285 7427.64,5285 7447.64,5305 P7.7@7527.64,5305
pads on no net: J1.3 J1.4 J1.5 J1.6 J1.7 J1.8 J1.9 J1.10 J1.11 J1.15 J1.16 J1.17 J1.18 J1.19 J1.20 J1.26 J1.27 J1.29 J1.30 J1.31 J1.32 J1.33 J1.34 JTAG1.13 U1.9 U1.12 U2.9 U2.12 U3.9 U3.12 U4.9 U4.12 U5.9 U5.12 U6.9 U6.12 U7.9 U7.10 U7.11 U7.12 U7.13 U7.14 U7.15 U8.13 U9.0 USB1.0 Y1.2 Y1.4 ZU1.3 ZU1.5 ZU1.15 ZU1.49 ZU1.83 ZU1.85 ZU1.86 ZU1.87 ZU1.88 ZU1.89 ZU1.91 ZU1.92 ZU1.93 ZU1.94 ZU1.95 ZU1.96 ZU1.97 ZU1.98 ZU1.99 ZU1.131

## Polygon pours and split planes (outlines as drawn)
GND on Bottom Layer "bpttom-GND" (solid, remove dead copper, pour order 2): 770,5770 1530,5770 1850,6090 1960,6200 4020,6200 7100,6200 7340,5960 7345,5955 7580,5955 7610,5925 7610,5765 7610,4100 7565,4055 7370,4055 7345,4030 7345,3745 7345,3190 7385,3150 7385,2330 7385,1655 7320,1590 7320,1255 7275,1210 7095,1210 985,1210 940,1255 930,1265 930,1670 930,1725 805,1850 710,1945 710,5700

## Keep-outs
Keep-Out Layer:
  the board outline again, w10

## Text inside footprints (layer, text, board x,y; h text height)
ZU1: Top Overlay "CN1" at 2920.83,5595 h28 r180; Top Overlay "CN2" at 2928.7,3510 h28 r180; Top Overlay "1" at 4968.07,3355 h28 r180; Top Overlay "1" at 4964.13,5435 h28 r180; Top Overlay "2" at 4972.01,5730 h28 r180; Top Overlay "2" at 4972.01,3650 h28 r180; Top Overlay "79" at 3027.13,5430 h28 r180; Top Overlay "80" at 3023.19,5735 h28 r180; Top Overlay "80" at 3027.13,3645 h28 r180; Top Overlay "79" at 3031.06,3350 h28 r180